# EAGLE board 4x4_hirose (EAGLE 7.2.0)
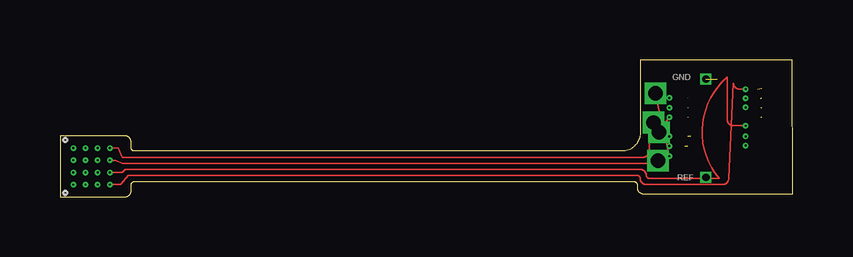
[diagram p0: board, top side]
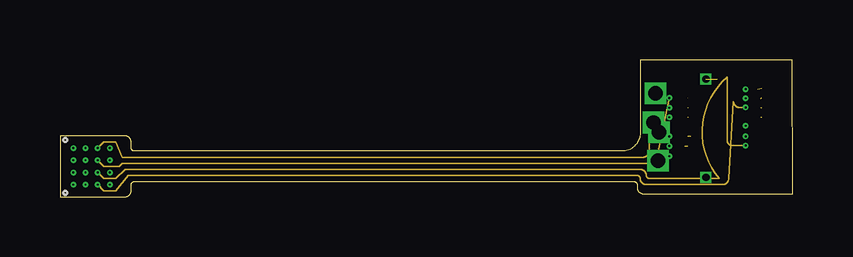
[diagram p1: board, inner layer Route2]
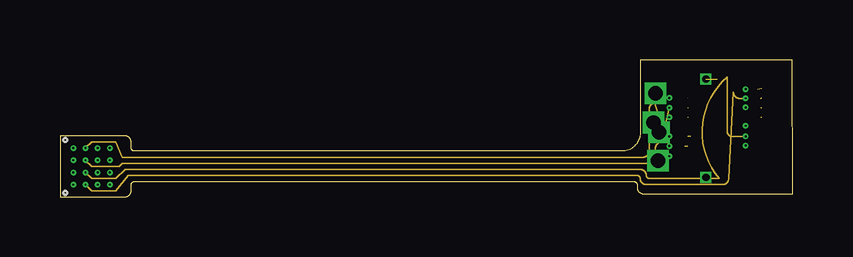
[diagram p2: board, inner layer Route15]
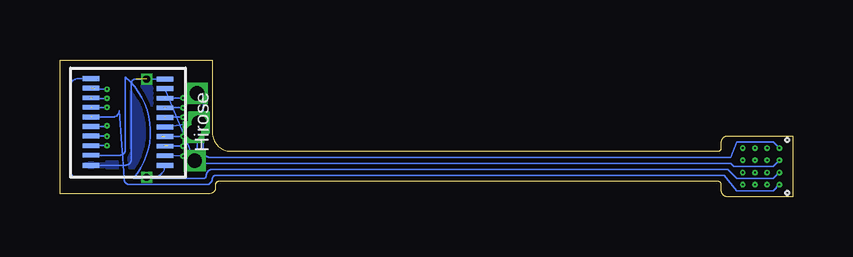
[diagram p3: board, bottom side, seen from below]

Size 30.53 x 5.71 mm. Coordinates in mm from the lower left corner, seen from the top.
Outline: 0,0 2.71,0 arc90 2.97,0.25 2.97,0.51 arc-90 3.09,0.64 23.92,0.64 arc-90 24.05,0.51 24.05,0.38 arc90 24.3,0.13 30.53,0.13 30.51,5.71 24.18,5.71 24.18,2.67 arc-90 23.41,1.91 3.09,1.91 arc-90 2.97,2.03 2.97,2.29 arc90 2.71,2.54 0,2.54 0,0
Copper layers (1*2*15*16): Top 0.035mm / dielectric 1.5mm / Route2 0.035mm / dielectric 0.15mm / Route15 0.035mm / dielectric 0.2mm / Bottom 0.035mm
Design rules "default *": minimum track width 3mil, minimum drill 0.1mm, track to track 0.15mm, track to pad 0.15mm, pad to pad 0.15mm, via to via 0.15mm, smd to smd 0.15mm, copper to edge 40mil, drill to drill 0.05mm, minimum pad ring 3mil, minimum via ring 3mil, stop-mask expansion 4mil, vias tented up to drill 0mil, thermal gap 10mil
Holes 0.15 mm at 0.21,2.37 0.21,0.17

## Footprints (pad centres in the part's own frame; a part is rotated, then mirrored left to right if it is on the bottom)
GG_4X4_ARRAY = drill 0.076 pad 0.178: P$1 0,0; P$2 0.508,0; P$3 1.016,0; P$4 1.524,0; P$5 0,-0.508; P$6 0.508,-0.508; P$7 1.016,-0.508; P$8 1.524,-0.508; P$9 0,-1.016; P$10 0.508,-1.016; P$11 1.016,-1.016; P$12 1.524,-1.016; P$13 0,-1.524; P$14 0.508,-1.524; P$15 1.016,-1.524; P$16 1.524,-1.524
HIROSE_DF40C-70DS = smd 0.2 x 0.7: P$1 0,0; P$2 -0.4,0; P$3 -0.8,0; P$4 -1.2,0; P$5 -1.6,0; P$6 -2,0; P$7 -2.4,0; P$8 -2.8,0; P$9 -3.2,0; P$10 -3.6,0; P$36 0,-3.08; P$37 -0.42,-3.08; P$38 -0.82,-3.08; P$39 -1.22,-3.08; P$40 -1.62,-3.08; P$41 -2.02,-3.08; P$42 -2.42,-3.08; P$43 -2.82,-3.08; P$44 -3.22,-3.08; P$45 -3.62,-3.08

## Placement (x,y rotation side)
U$1  GG_4X4_ARRAY  [GG_4X4_ARRAY]  0.55,2.03 0 top
U$3  HIROSE_DF40_70PIN  [HIROSE_DF40C-70DS]  26.15,1.32 270 bottom

## Library data of the parts
U$1 = GG_4x4_3mildrill_20milspacing
U$3 = GG_hirose20

## Nets
GND: U$3.P$10 U$3.P$36
N$1: U$1.P$4 U$3.P$5
N$20: U$1.P$1 U$3.P$2
N$30: U$1.P$2 U$3.P$3
N$40: U$1.P$3 U$3.P$4
N$60: U$1.P$5 U$3.P$6
N$70: U$1.P$6 U$3.P$7
N$80: U$1.P$7 U$3.P$8
N$90: U$1.P$8 U$3.P$9
N$100: U$1.P$9 U$3.P$40
N$110: U$1.P$10 U$3.P$39
N$120: U$1.P$11 U$3.P$38
N$130: U$1.P$12 U$3.P$37
N$140: U$1.P$13 U$3.P$44
N$150: U$1.P$14 U$3.P$43
N$160: U$1.P$15 U$3.P$42
N$170: U$1.P$16 U$3.P$41
REF: U$3.P$1 U$3.P$45

## Tracks (layer width: path | path; a pad name or v marks a point on that pad's centre or on a via)
GND  (via drill 0.3)  (1 unrouted)
  Bottom 0.07: U$3.P$10 27.38,4.92 arc-90 27.55,4.74 27.55,1.57 arc90 27.8,1.32 U$3.P$36
  other vias: 26.92,4.91
  pour Bottom: 24.18,5.71 30.53,5.71 30.53,0.38 24.18,0.38
N$1  (via drill 0.6)
  Top 0.07: U$1.P$4 2.43,2.03 2.59,1.65 24.3,1.65 arc90 24.56,1.91 24.56,2.92 arc-90 v24.73,3.1
  Bottom 0.07: U$3.P$5 v24.73,3.1
N$20  (via drill 0.08, 0.6)
  Top 0.07: v25.39,1.7 v24.81,4.32
  Bottom 0.07: U$1.P$1 0.81,2.29 2.33,2.29 2.59,1.65 24.3,1.65 arc90 24.56,1.91 24.56,4.06 arc-90 v24.81,4.32 | U$3.P$2 25.41,1.72 arc90 v25.39,1.7
N$30  (via drill 0.08)  (1 unrouted)
  Route15 0.07: U$1.P$2 1.32,2.29 2.33,2.29 2.59,1.65 24.3,1.65 arc90 24.56,1.91 24.56,3.68 arc-90 24.77,3.9 v25.39,2.12
  Bottom 0.07: v25.39,2.12 26.03,2.12
N$40  (via drill 0.08)  (1 unrouted)
  Route2 0.07: U$1.P$3 1.82,2.29 2.33,2.29 2.59,1.65 24.3,1.65 arc90 24.56,1.91 24.56,3.3 arc-90 24.75,3.49 v25.39,2.52
  Bottom 0.07: v25.39,2.52 26.28,2.52
N$60  (via drill 0.08, 0.6)  (1 unrouted)
  Top 0.07: v25.39,3.32 v24.96,2.69
  Bottom 0.07: U$1.P$5 0.81,1.27 2.46,1.27 2.59,1.4 24.56,1.4 arc90 24.81,1.65 24.81,2.54 arc-90 v24.96,2.69 | U$3.P$6 v25.39,3.32
N$70  (via drill 0.08)  (1 unrouted)
  Route15 0.07: U$1.P$6 1.32,1.27 2.46,1.27 2.59,1.4 24.56,1.4 arc90 24.81,1.65 24.81,2.03 arc-90 25.08,2.3 v25.39,3.71
  Bottom 0.07: U$3.P$7 v25.39,3.71
N$80  (via drill 0.08)  (1 unrouted)
  Route2 0.07: U$1.P$7 1.82,1.27 2.46,1.27 2.59,1.4 24.56,1.4 arc90 24.81,1.65 24.81,1.78 arc-90 24.93,1.89 v25.39,4.12
  Bottom 0.07: U$3.P$8 v25.39,4.12
N$90  (via drill 0.6)
  Top 0.07: U$1.P$8 2.33,1.52 2.59,1.4 24.56,1.4 arc90 24.75,1.46 arc-90 v24.91,1.5
  Bottom 0.07: U$3.P$9 v24.91,1.5
N$100  (via drill 0.08)
  Top 0.07: v28.57,2.97 28.06,2.97 arc-90 27.8,3.22 27.8,5 arc90 27.48,0.76
  Bottom 0.07: U$1.P$9 0.81,0.76 2.33,0.76 2.71,1.14 24.18,1.14 arc-90 24.43,0.89 arc90 24.56,0.76 27.48,0.76 | U$3.P$40 28.6,2.94 arc-90 v28.57,2.97
N$110  (via drill 0.08)
  Route15 0.07: U$1.P$10 1.32,0.76 2.33,0.76 2.71,1.14 24.18,1.14 arc-90 24.43,0.89 arc90 24.56,0.76 27.48,0.76 arc-90 27.8,5 27.8,2.71 arc90 28,2.52 v28.57,2.52
  Bottom 0.07: U$3.P$39 28.58,2.54 arc90 v28.57,2.52
N$120  (via drill 0.08)
  Route2 0.07: U$1.P$11 1.82,0.76 2.33,0.76 2.71,1.14 24.18,1.14 arc-90 24.43,0.89 arc90 24.56,0.76 27.48,0.76 arc-90 27.8,5 27.8,2.33 arc90 28,2.14 v28.57,2.14
  Bottom 0.07: U$3.P$38 v28.57,2.13 arc-90 v28.57,2.14
N$130
  Top 0.07: U$1.P$12 2.59,1.02 2.71,1.14 24.18,1.14 arc-90 24.43,0.89 arc90 24.56,0.76 27.48,0.76
  Bottom 0.07: U$3.P$37 28.02,1.74 arc-90 27.8,1.95 27.8,5 arc90 27.48,0.76
N$140  (via drill 0.08)  (1 unrouted)
  Top 0.07: v28.57,4.49 28.31,4.49 arc-90 28.06,4.74 27.86,0.76
  Bottom 0.07: U$1.P$13 0.81,0.25 2.33,0.25 2.84,0.89 24.05,0.89 arc-90 24.18,0.76 arc90 24.43,0.51 27.61,0.51 arc90 27.86,0.76 | v28.57,4.49 29.07,4.49
N$150  (via drill 0.08)  (1 unrouted)
  Route15 0.07: U$1.P$14 1.32,0.25 2.33,0.25 2.84,0.89 24.05,0.89 arc-90 24.18,0.76 arc90 24.43,0.51 27.61,0.51 arc90 27.86,0.76 28.06,4.36 arc90 28.31,4.11 v28.57,4.11
  Bottom 0.07: v28.57,4.11 29.2,4.11
N$160  (via drill 0.08)  (1 unrouted)
  Route2 0.07: U$1.P$15 1.82,0.25 2.33,0.25 2.84,0.89 24.05,0.89 arc-90 24.18,0.76 arc90 24.43,0.51 27.61,0.51 arc90 27.86,0.76 28.06,3.98 arc90 28.31,3.73 v28.57,3.73
  Bottom 0.07: v28.57,3.73 29.2,3.73
N$170  (1 unrouted)
  Top 0.07: U$1.P$16 2.52,0.51 2.84,0.89 24.05,0.89 arc-90 24.18,0.76 arc90 24.43,0.51 27.61,0.51 arc90 27.86,0.76
  Bottom 0.07: 29.2,3.32 28.34,3.32 arc-90 28.06,3.6 27.86,0.76
REF  (via drill 0.3)
  Bottom 0.07: U$3.P$45 29.77,4.94 arc-90 30.09,4.62 30.09,1.06 arc-90 29.84,0.81 v26.92,0.81 26.66,0.81 arc-90 U$3.P$1

## Text on the board
tNames: GND | REF